# Altium PCB RF-Pi+Carrier+Board+v1.pcbdoc
Units mm, origin at the board's own origin, x right, y up, seen from the top; angles counter-clockwise.
Board outline 114.55 x 61.66 mm, 2 copper layers (Top Layer, Bottom Layer); 25 components, 48 nets, 121 pads, 16 vias.
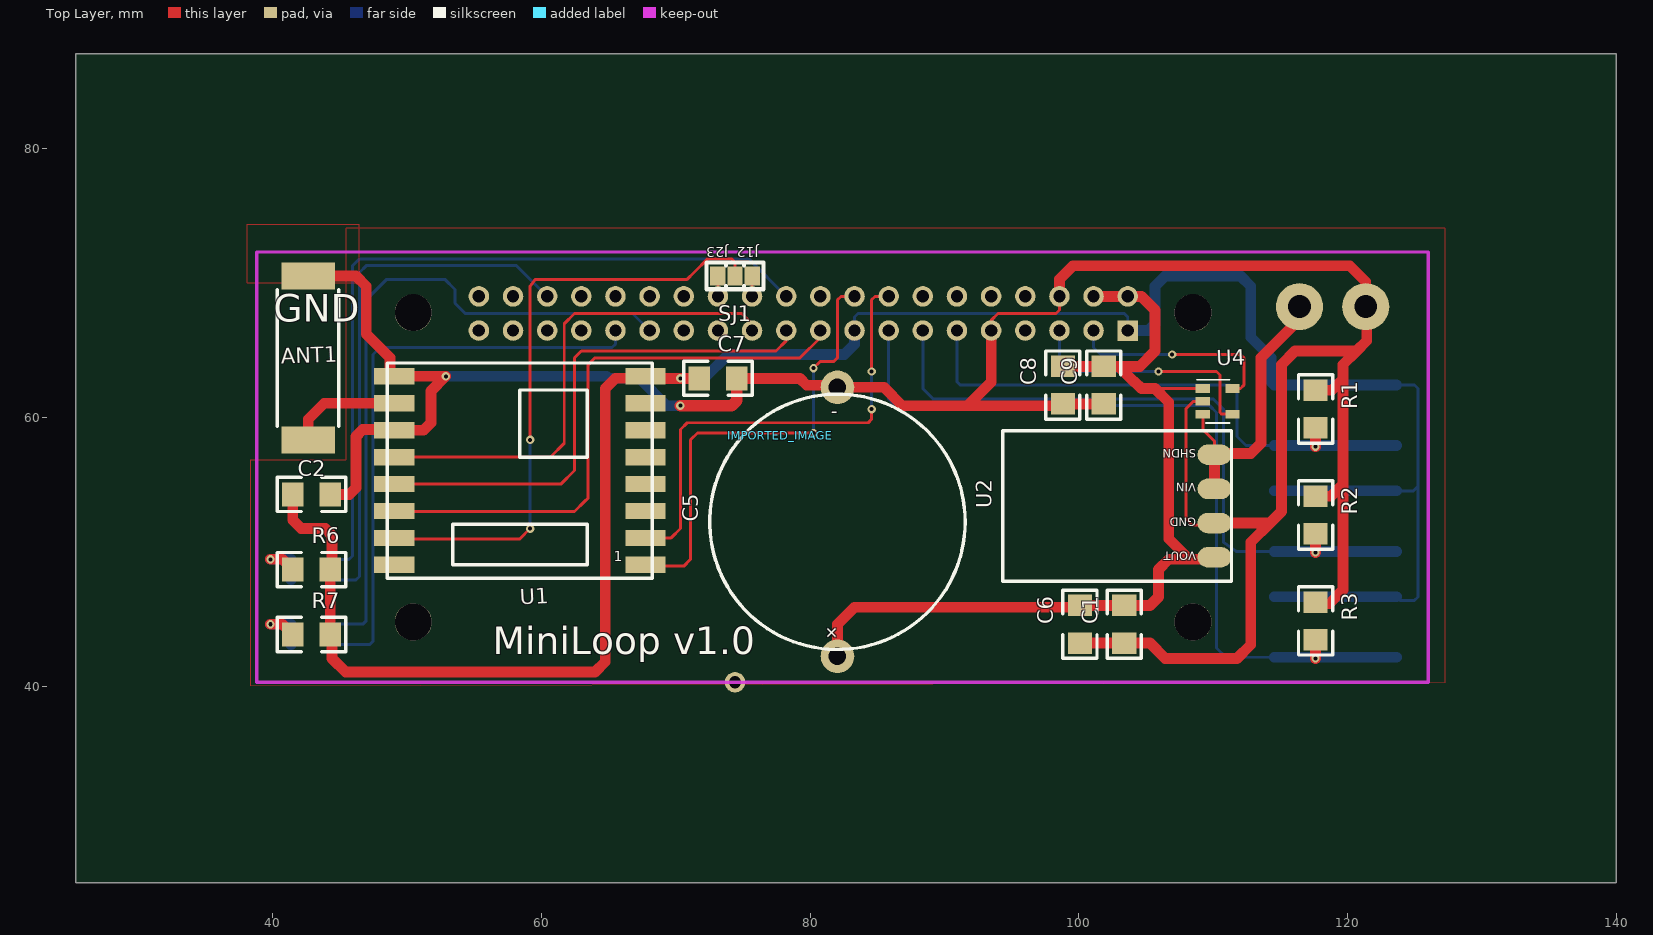
[diagram p0: Top Layer view]
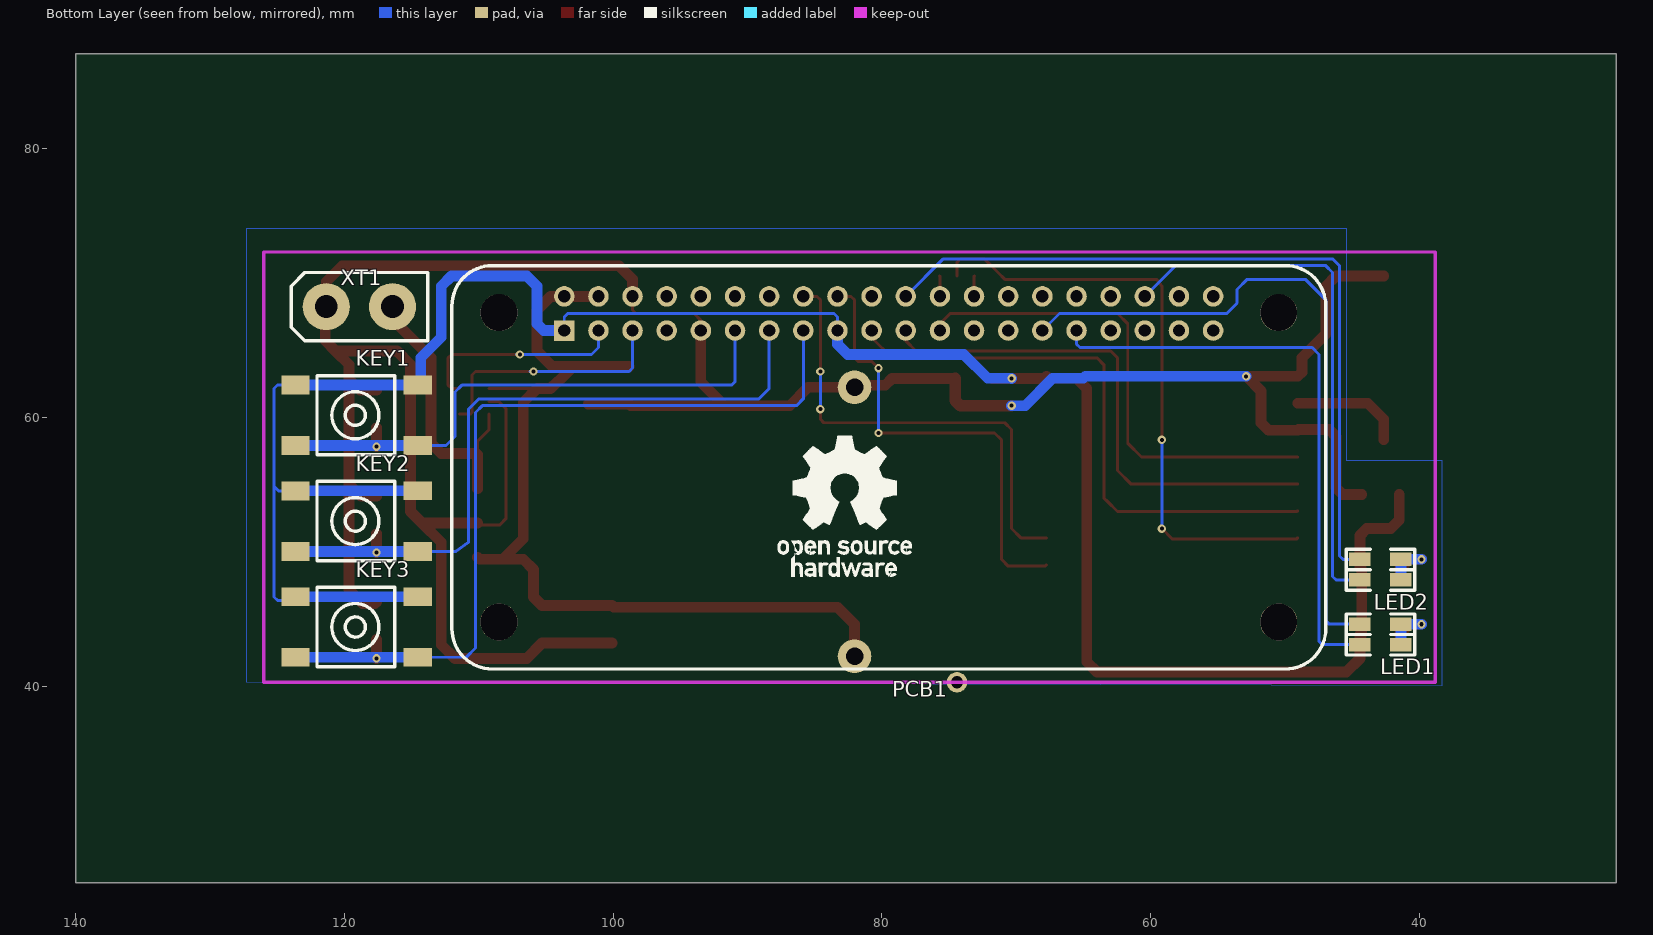
[diagram p1: Bottom Layer view, seen from below]

## Layer stack, top to bottom
Top Layer: signal copper (thickness not stored)
Dielectric: dielectric 0.32, FR-4, Dk 4.8
Bottom Layer: signal copper (thickness not stored)

## Board outline
139.954,25.4 25.4,25.4 25.4,87.058 139.954,87.058

## Components (designator, comment, footprint, x,y, rotation, side; value= is the part's Value field where it differs from the comment)
ANT1 "ACAG1204-868-T" ANTENNA-CHIP-12X4MM 42.672,58.356 r0 top
C1 "47uF" 1206 103.378,44.64 r90 top
C2 "47uF" 1206 42.926,54.292 r180 top
C5 "1F" SE-5R5-D105VYH 82.042,52.261 r90 top
C6 "47uF" 1206 100.076,44.64 r90 top
C7 "47uF" 1206 73.152,62.928 r0 top
C8 "47uF" 1206 98.806,62.42 r90 top
C9 "47uF" 1206 101.854,62.42 r90 top
IMPORTED_IMAGE "IMPORTED_IMAGE" IMPORTED_IMAGE 77.77,58.67 r0 top
KEY1 "4-1437565-2" KEY-6.0*6.0 119.126,60.134 r0 bottom
KEY2 "4-1437565-2" KEY-6.0*6.0 119.126,52.261 r0 bottom
KEY3 "4-1437565-2" KEY-6.0*6.0 119.126,44.386 r0 bottom
LED1 "15-22SURSYGC/S530-A2/TR8" 1206X2 42.926,43.878 r180 bottom
LED2 "15-22SURSYGC/S530-A2/TR8" 1206X2 42.926,48.704 r180 bottom
PCB1 "RASPBERRY_PI_ZERO" "RASPBERRY PI ZERO (FACE UP) OUTLINE" 46.99,71.31 r180 bottom
R1 "100KΩ" 1206 117.602,60.642 r270 top
R2 "100KΩ" 1206 117.602,52.768 r270 top
R3 "100KΩ" 1206 117.602,44.895 r270 top
R6 "75Ω" 1206 42.926,48.704 r0 top
R7 "75Ω" 1206 42.926,43.878 r0 top
SJ1 "JUMPER-PAD-3-NO" JUMPER_SOLDER 74.422,70.549 r180 top
U1 "RFM69H" RFM69W-XXXS2 58.42,56.07 r180 top
U2 "Polulu_S7V8A" POLULU_S7V8A_SMD 111.506,47.688 r90 top
U4 "MCP3221A5T-I/OT" SOT-23-5 109.22,62.166 r0 top
XT1 "XT30" "XT30 BY BUCK" 118.872,68.263 r180 bottom

## Footprints (in the part's own frame and the unit in brackets; to place one, negate y for a bottom-side part, rotate by r counter-clockwise, add the part's x,y. Pads: shape width x height; smd on the part's side, far side on the other; paste and mask are expansions set on the pad)
1206 [mil]
  rect 63x70.9 smd: 1(-55,-0.05) 2(55,-0.05)
  silkscreen extent -100,-50 100,50
1206X2 [mil]
  rect 63x39.37 smd: 1(60,30) 2(-60,30) 3(60,-30) 4(-60,-30)
  silkscreen extent -100,-60 100,60
ANTENNA-CHIP-12X4MM [mm]
  rect 4x2 smd: 1(0,0) 2(0,12.192)
  silkscreen extent -2.29,1.02 2.29,11.18
IMPORTED_IMAGE [mm]
JUMPER_SOLDER [mil]
  rect 45x56 smd: 1(-51,0) 2(0,0) 3(51,0)
  silkscreen extent -83,-39 83,39
KEY-6.0*6.0 [mm]
  rect 2.1x1.4 smd: 1(-4.601,2.201) 2(4.502,2.201) 3(-4.604,-2.303) 4(4.502,-2.301)
  silkscreen extent -2.9,-3 2.9,2.9
POLULU_S7V8A_SMD [mil]
  oval 60x99.37 smd: 1(76.4,56.1) 2(176.4,56.1) 3(276.4,56.1) 4(376.4,56.1)
  silkscreen extent 6,6 446,676
"RASPBERRY PI ZERO (FACE UP) OUTLINE" [mil]
  rect 60x60 hole 36: 1(-2230,-190)
  round 60 hole 36: 2(-2230,-90) 3(-2130,-190) 4(-2130,-90) 5(-2030,-190) 6(-2030,-90) 7(-1930,-190) 8(-1930,-90) 9(-1830,-190) 10(-1830,-90) 11(-1730,-190) 12(-1730,-90) 13(-1630,-190) 14(-1630,-90) 15(-1530,-190) 16(-1530,-90) 17(-1430,-190) 18(-1430,-90) 19(-1330,-190) 20(-1330,-90) 21(-1230,-190) 22(-1230,-90) 23(-1130,-190) 24(-1130,-90) 25(-1030,-190) 26(-1030,-90) 27(-930,-190) 28(-930,-90) 29(-830,-190) 30(-830,-90) 31(-730,-190) 32(-730,-90) 33(-630,-190) 34(-630,-90) 35(-530,-190) 36(-530,-90) 37(-430,-190) 38(-430,-90) 39(-330,-190) 40(-330,-90)
  round 108.27 hole 108.27 unplated: ""(-2421.3,-1043.3) ""(-2421.3,-137.8) ""(-137.8,-1043.3) ""(-137.8,-137.8)
  silkscreen extent -2559,-1181 0,0
RFM69W-XXXS2 [mil]
  rect 118.1x47.2 smd: 1(-368.05,276) 2(-368.05,197) 3(-368.05,118) 4(-368.05,39) 5(-368.05,-39) 6(-368.05,-118) 7(-368.05,-197) 8(-368.05,-276) 9(367.95,-276) 10(367.95,-197) 11(367.95,-118) 12(367.95,-39) 13(367.95,39) 14(367.95,118) 15(367.95,197) 16(367.95,276)
  silkscreen extent -388,-315 388,315
SE-5R5-D105VYH [mm]
  round 2.5 hole 1.3: 1(-10,0) 2(10,0)
  silkscreen extent -9.5,-9.5 9.5,9.5
SOT-23-5 [mm]
  rect 1.06x0.65 smd: 1(0,0) 2(0,-0.95) 3(0,-1.9) 4(2.2,-1.9) 5(2.2,0)
  silkscreen extent -0.45,-2.56 2,0.66
"XT30 BY BUCK" [mil]
  round 137.79 hole 66.93: 1(97,0) 2(-97,0)
  silkscreen extent -200,-100 200,100

## Free pads (board coordinates)
  round 1.524 hole 0.914: 1(74.422,40.322)

## Via types
v1: diameter 0.62, hole 0.305, Top Layer to Bottom Layer, 16 vias

## Nets (pads, with @x,y where several pads share a name; then routed paths per layer and width w, separated by ;. In a path a pad name is that pad's centre, name@x,y a point inside that pad or via, vN(x,y) a via of type N, cw(c..) or ccw(c..) an arc to the next point about the centre after c; other vN are vias at no path point)
$BoardOutlineNet: 
+3.3V: C2.2 C7.1 KEY1.3 KEY1.4 KEY2.3 KEY2.4 KEY3.3 KEY3.4 PCB1.1 PCB1.17 R6.2 R7.2 U1.8 | length 169.8
  Top Layer w0.8: C2.2@41.529,54.292 41.529,52.387 42.164,51.752 43.942,51.752 44.45,51.244 44.45,48.829 R6.2 R7.2 ; R7.2@44.45,43.878 44.45,42.1 45.466,41.084 64.008,41.084 64.77,41.846 64.77,62.166 65.532,62.928 67.617,62.928 67.77,63.081 67.922,62.926 v1(70.358,62.927) C7.1
  Bottom Layer w0.22: PCB1.17 83.312,67.501 83.566,67.754 103.378,67.754 103.632,67.501 PCB1.1 ; KEY3.4@123.629,46.688 123.899,46.419 124.968,46.419 125.222,46.672 125.222,62.166 124.953,62.436 KEY1.4@123.629,62.436 ; KEY2.4@123.629,54.562 124.879,54.562 125.222,54.905
  Bottom Layer w0.8: v1(70.358,62.927) 72.136,62.928 73.914,64.706 82.55,64.706 83.312,65.468 PCB1.17 ; PCB1.1 105.156,66.484 105.664,66.992 105.664,69.787 106.426,70.549 112.014,70.549 112.776,69.787 112.776,65.977 114.3,64.453 114.3,62.659 114.524,62.436 KEY1.4 KEY1.4@123.629,62.436 ; KEY3.3@114.524,46.688 KEY3.4 KEY3.4@123.629,46.688 ; KEY2.3@114.524,54.562 KEY2.4 KEY2.4@123.629,54.562
+5V: C1.2 C5.1 C6.2 C8.2 C9.2 PCB1.2 PCB1.4 U2.1 U4.1 | length 70.1
  Top Layer w0.22: 105.664,62.166 U4.1
  Top Layer w0.8: C5.1 82.042,44.64 83.312,45.91 99.952,45.91 100.079,46.038 103.381,46.038 105.283,46.038 105.918,46.672 105.918,48.704 106.68,49.466 109.918,49.466 U2.1 ; C8.2@98.809,63.817 101.857,63.817 104.521,63.817 105.664,64.96 105.664,68.008 104.648,69.025 PCB1.2 PCB1.4 ; 102.961,63.817 104.104,62.674 104.14,62.674 104.648,62.166 105.664,62.166 106.68,61.151 106.68,50.99 108.204,49.466 108.557,49.466
GND: ANT1.2 C1.1 C2.1 C5.2 C6.1 C7.2 C8.1 C9.1 PCB1.6 PCB1.9 R1.1 R2.1 R3.1 U1.9 U1.11 U2.2 U4.2 XT1.2 | length 212.8
  Top Layer w0.22: PCB1.9 93.472,67.246 93.98,67.754 98.298,67.754 98.552,68.008 PCB1.6 ; U4.2 108.524,61.217 107.95,60.642 107.95,52.514 108.458,52.006 109.918,52.006 U2.2
  Top Layer w0.8: ANT1.2 46.228,70.549 46.99,69.787 46.99,66.23 48.768,64.453 48.768,63.386 49.075,63.081 v1(52.912,63.081) 51.816,61.984 51.816,59.627 51.257,59.068 49.075,59.068 49.025,59.118 46.736,59.118 46.228,58.61 46.228,54.8 45.723,54.292 C2.1@44.323,54.292 ; C7.2 79.251,62.926 79.756,62.42 81.882,62.42 C5.2 85.504,62.26 86.868,60.896 98.682,60.896 98.809,61.023 C9.1@101.857,61.023 ; 91.719,60.896 93.472,62.649 PCB1.9 ; PCB1.6 98.552,70.294 99.568,71.31 120.142,71.31 121.336,70.117 ; C6.1@100.079,43.243 103.381,43.243 105.283,43.243 106.426,42.1 111.76,42.1 112.776,43.116 112.776,50.736 114.209,52.169 ; U2.2 114.209,52.169 ; R3.1 117.729,46.164 118.618,46.164 119.634,47.18 119.634,63.944 120.65,64.96 ; R2.1 118.76,54.165 119.634,55.039 ; R1.1 118.811,62.039 119.634,62.862 ; XT1.2@121.336,68.77 121.336,70.117 ; 114.209,52.169 115.062,53.023 115.062,63.944 116.078,64.96 120.65,64.96 ; 120.65,64.96 121.412,65.722 121.412,68.186 XT1.2 121.336,70.117
  Top Layer w0.88: v1(70.358,60.896) 74.168,60.896 74.549,61.277 C7.2
  Bottom Layer w0.8: v1(52.912,63.081) 64.872,63.081 65.024,62.928 67.31,62.928 69.342,60.896 v1(70.358,60.896)
KEY1: KEY1.1 KEY1.2 PCB1.11 R1.2 | length 41.8
  Top Layer w0.8: v1(117.602,57.848) R1.2
  Bottom Layer w0.22: PCB1.11 90.932,62.674 91.186,62.42 111.252,62.42 111.76,61.912 111.76,58.61 112.438,57.932 KEY1.1@114.526,57.932
  Bottom Layer w0.8: KEY1.1@114.526,57.932 KEY1.2@123.629,57.932
KEY2: KEY2.1 KEY2.2 PCB1.13 R2.2 | length 51.7
  Top Layer w0.8: v1(117.602,49.974) R2.2
  Bottom Layer w0.22: PCB1.13 88.392,62.166 89.154,61.404 109.982,61.404 110.744,60.642 110.749,50.731 111.676,50.058 KEY2.1@114.526,50.058
  Bottom Layer w0.8: KEY2.1@114.526,50.058 KEY2.2@123.629,50.058
KEY3: KEY3.1 KEY3.2 PCB1.15 R3.2 | length 62.5
  Top Layer w0.8: v1(117.602,42.1) R3.2
  Bottom Layer w0.22: PCB1.15 85.852,61.404 86.36,60.896 109.728,60.896 110.236,60.389 110.236,42.862 110.914,42.184 KEY3.1@114.526,42.184
  Bottom Layer w0.8: KEY3.1@114.526,42.184 KEY3.2@123.629,42.184
LED1_1: LED1.1 LED1.3 R7.1 | length 5
  Top Layer w0.8: v1(39.878,44.64) 40.767,44.64 R7.1
  Bottom Layer w0.8: v1(39.878,44.64) LED1.1 LED1.3
LED2_1: LED2.1 LED2.3 R6.1 | length 5
  Top Layer w0.8: v1(39.878,49.466) 40.767,49.466 R6.1
  Bottom Layer w0.8: v1(39.878,49.466) LED2.1 LED2.3
LED11: LED1.2 PCB1.29 | length 50.4
  Bottom Layer w0.22: LED1.2 46.736,44.64 46.99,44.895 46.99,64.198 46.99,68.77 48.514,70.294 52.578,70.294 52.832,70.294 53.594,69.532 53.594,68.516 53.848,68.263 54.356,67.754 66.802,67.754 PCB1.29
LED12: LED1.4 PCB1.31 | length 43.9
  Bottom Layer w0.22: LED1.4 47.244,43.116 47.498,43.37 47.498,64.198 47.498,64.706 48.006,65.215 65.278,65.215 65.532,65.468 PCB1.31
LED21: LED2.2 PCB1.22 | length 57
  Bottom Layer w0.22: LED2.2 45.72,49.466 45.974,49.721 45.974,64.198 ; 45.974,64.072 45.974,71.31 46.482,71.819 57.15,71.819 75.184,71.819 75.438,71.819 PCB1.22
LED22: LED2.4 PCB1.36 | length 39.9
  Bottom Layer w0.22: LED2.4 45.974,47.942 46.228,47.942 46.482,48.197 46.482,52.514 46.482,64.198 46.482,70.802 46.99,71.31 48.26,71.31 58.166,71.31 PCB1.36
PCB1_7: PCB1.7
PCB1_8: PCB1.8
PCB1_10: PCB1.10
PCB1_12: PCB1.12
PCB1_14: PCB1.14
PCB1_20: PCB1.20
PCB1_24: PCB1.24 SJ1.1 | length 1.5
  Top Layer w0.22: PCB1.24 75.692,70.523 SJ1.1
PCB1_25: PCB1.25
PCB1_26: PCB1.26 SJ1.3 | length 1.5
  Top Layer w0.22: SJ1.3 73.152,70.523 PCB1.26
PCB1_27: PCB1.27
PCB1_28: PCB1.28
PCB1_30: PCB1.30
PCB1_32: PCB1.32
PCB1_33: PCB1.33
PCB1_34: PCB1.34
PCB1_35: PCB1.35
PCB1_37: PCB1.37
PCB1_38: PCB1.38
PCB1_39: PCB1.39
PCB1_40: PCB1.40
SCL: PCB1.3 U4.5 | length 16
  Top Layer w0.22: v1(106.934,64.706) 112.014,64.706 112.268,64.453 112.268,62.42 112.014,62.166 U4.5
  Bottom Layer w0.22: PCB1.3 101.092,65.215 101.6,64.706 v1@107.188,64.706
SDA: PCB1.5 U4.4 | length 19
  Top Layer w0.22: v1(105.918,63.436) 110.236,63.436 110.49,63.182 110.49,60.389 110.612,60.267 U4.4
  Bottom Layer w0.22: PCB1.5 98.552,63.691 98.806,63.436 v1@106.172,63.436
U1_1: PCB1.18 U1.1 | length 34.5
  Top Layer w0.22: U1.1@67.77,49.06 67.871,48.959 70.612,48.959 71.12,49.466 71.12,58.356 71.628,58.864 v1(80.264,58.864) ; v1(80.264,63.691) 80.772,64.198 81.788,64.198 82.042,64.453 82.042,68.77 82.296,69.025 PCB1.18
  Bottom Layer w0.22: v1(80.264,58.864) v1(80.264,63.691)
U1_2: PCB1.16 U1.2 | length 35
  Top Layer w0.22: U1.2@67.77,51.067 69.672,51.067 70.358,51.752 70.358,59.118 70.866,59.627 84.328,59.627 84.582,59.88 84.582,60.389 v1(84.582,60.642) ; v1(84.582,63.436) 84.582,63.691 84.582,68.77 84.836,69.025 PCB1.16
  Bottom Layer w0.22: v1(84.582,60.642) v1(84.582,63.436)
U1_3: U1.3
U1_4: U1.4
U1_5: U1.5
U1_6: U1.6
U1_7: U1.7
U1_10: ANT1.1 U1.10 | length 8.4
  Top Layer w0.8: ANT1.1 42.672,59.88 43.866,61.074 U1.10@49.075,61.074
U1_12: PCB1.23 U1.12 | length 40.1
  Top Layer w0.22: U1.12@49.075,57.061 49.101,57.087 60.706,57.087 61.722,58.102 61.722,66.992 ; PCB1.23 75.692,66.992 74.93,67.754 62.992,67.754 62.484,67.754 61.722,66.992 ; 61.722,66.992 61.722,65.468 61.722,66.992
U1_13: PCB1.21 U1.13 | length 39.3
  Top Layer w0.22: U1.13@49.075,55.08 49.101,55.054 61.468,55.054 62.484,56.07 62.484,64.453 62.992,64.96 63.5,64.96 77.47,64.96 78.232,65.722 PCB1.21
U1_14: PCB1.19 U1.14 | length 43.4
  Top Layer w0.22: U1.14@49.075,53.073 49.126,53.023 60.96,53.023 62.484,53.023 63.246,53.785 63.5,54.038 63.5,63.944 64.008,64.453 79.248,64.453 80.772,65.977 PCB1.19
U1_15: SJ1.2 U1.15 | length 45.7
  Top Layer w0.22: U1.15@49.075,51.067 49.152,50.99 58.42,50.99 v1(59.182,51.752) ; v1(59.182,58.356) 59.182,69.787 59.563,70.294 70.866,70.294 71.374,70.802 72.39,71.819 74.168,71.819 74.422,71.564 SJ1.2
  Bottom Layer w0.22: v1(59.182,51.752) v1(59.182,58.356)
U4_3: U2.3 U2.4 U4.3 XT1.1 | length 21.1
  Top Layer w0.22: U4.3 109.22,59.118 109.728,58.61 110.081,58.257 U2.4
  Top Layer w0.8: U2.3 U2.4 110.172,57.34 112.776,57.34 113.538,58.102 113.538,64.453 116.408,67.323 XT1.1
pads on no net: PCB1. U1.16

## Polygon pours and split planes (outlines as drawn)
GND on Bottom Layer (solid): 45.466,73.85 45.466,56.832 38.354,56.832 38.354,40.069 127.254,40.322 127.254,74.105 45.466,74.105
GND on Top Layer (solid): 45.466,73.85 45.466,56.832 38.354,56.832 38.354,40.069 127.254,40.322 127.254,74.105 45.466,74.105
GND on Top Layer (solid): 38.1,70.04 46.482,70.04 46.482,74.358 38.1,74.358

## Silkscreen, mask and mechanical layers (free items; w line width, h text height)
Top Overlay:
  text "MiniLoop v1.0" at 56.388,42.423 h2.03

## Text inside footprints (layer, text, board x,y; h text height)
ANT1: Top Overlay "GND" at 40.132,67.155 h2.03
C5: Top Overlay "+" at 82.307,43.892 h1 r135; Top Overlay "-" at 82.047,60.767 h1 r180
SJ1: Top Overlay "J12" at 76.175,72.682 h0.76 r180; Top Overlay "J23" at 73.914,72.682 h0.76 r180
U1: Top Overlay "1" at 65.405,49.34 h0.76
U2: Top Overlay "SHDN" at 108.712,57.658 h0.64 r180; Top Overlay "VIN" at 108.718,55.118 h0.64 r179; Top Overlay "GND" at 108.712,52.578 h0.64 r180; Top Overlay "VOUT" at 108.712,50.038 h0.64 r180